# Altium PCB TB6600_Base.PcbDoc (part 2 of 4)
Units mm, origin at the board's own origin, x right, y up, seen from the top; angles counter-clockwise.
Board outline 300 x 300 mm, 2 copper layers (Top Layer, Bottom Layer); 129 components, 65 nets, 411 pads, 153 vias.
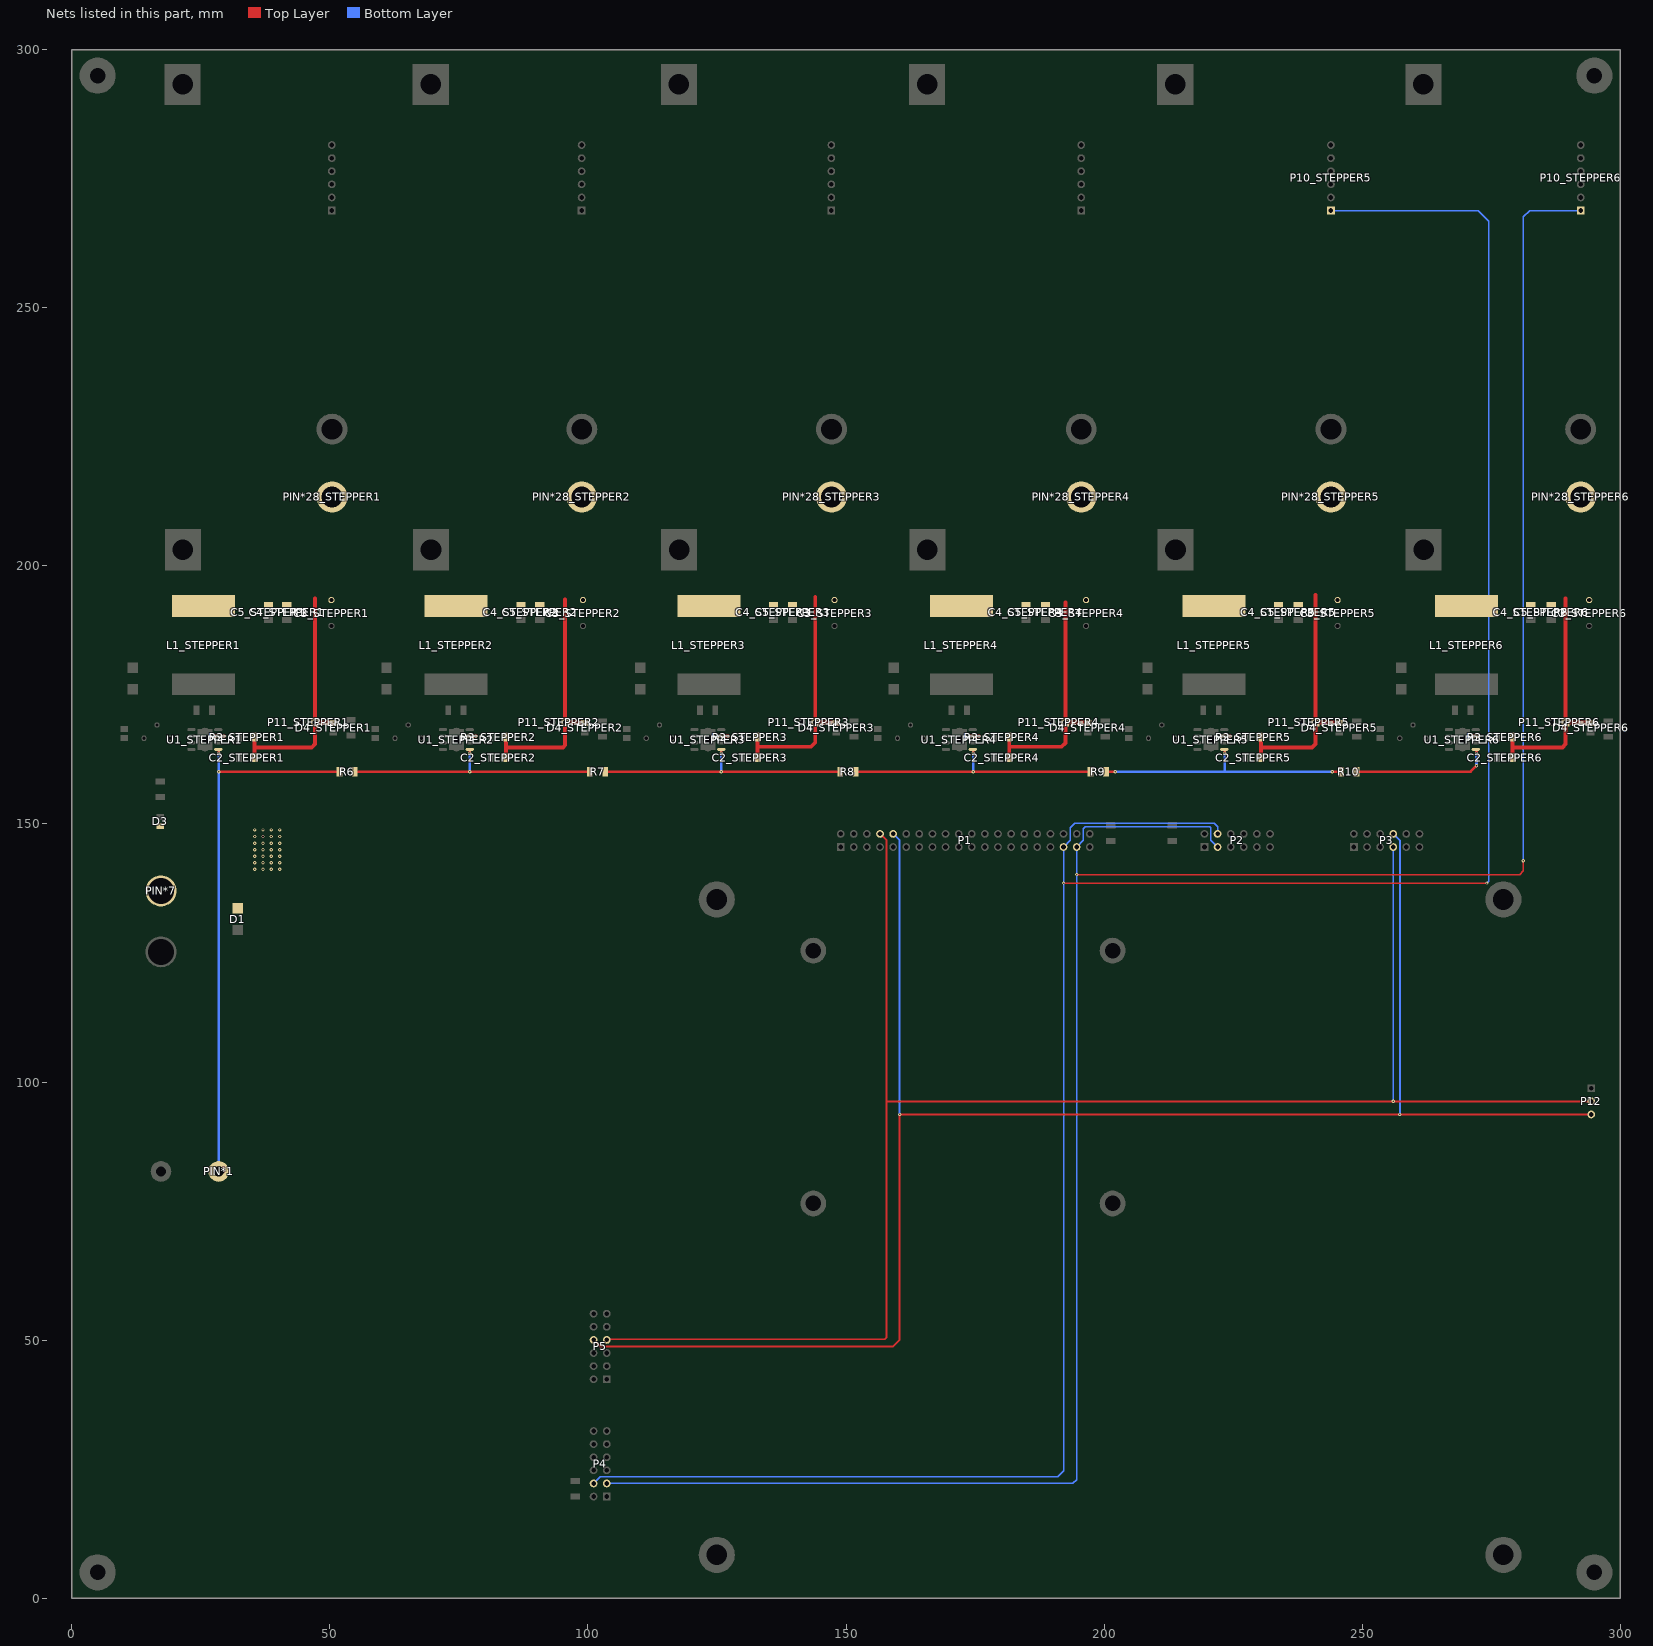
[diagram p2: the nets of this part, all layers, seen from the top]

## Via types
v1: diameter 0.65, hole 0.3, Top Layer to Bottom Layer, tented both sides, 153 vias

## Nets (pads, with @x,y where several pads share a name; then routed paths per layer and width w, separated by ;. In a path a pad name is that pad's centre, name@x,y a point inside that pad or via, vN(x,y) a via of type N, cw(c..) or ccw(c..) an arc to the next point about the centre after c; other vN are vias at no path point) (continued)
PLUSE5: P1.35 P2.4 P4.4 P10_STEPPER5.1 | length 489.7
  Top Layer w0.254: v1(192.151,138.557) v1(274.193,138.557)
  Bottom Layer w0.254: P4.4@101.092,22.225 102.362,23.495 191.008,23.495 192.151,24.638 192.151,30.353 v1(192.151,138.557) P1.35@192.151,145.542 193.421,146.812 193.421,149.225 194.31,150.114 221.361,150.114 221.996,149.479 P2.4@221.996,148.082 ; P10_STEPPER5.1@243.958,268.859 272.542,268.859 274.574,266.827 274.574,138.938 v1(274.193,138.557)
PLUSE6: P1.37 P2.3 P4.3 P10_STEPPER6.1 | length 472.4
  Top Layer w0.254: v1(194.691,140.208) 280.543,140.208 281.241,140.906 v1(281.241,142.875)
  Bottom Layer w0.254: P4.3@103.632,22.225 193.929,22.225 194.691,22.987 v1(194.691,140.208) P1.37@194.691,145.542 195.961,146.812 195.961,149.098 196.342,149.479 220.472,149.479 220.698,149.253 220.698,146.84 P2.3@221.996,145.542 ; v1(281.241,142.875) 281.241,267.652 282.448,268.859 P10_STEPPER6.1@292.354,268.859
RXD: P1.10 P3.8 P5.8 P12.3 | length 347.8
  Top Layer w0.381: P5.8@101.092,50.038 102.362,48.768 159.131,48.768 160.401,50.038 v1(160.401,93.726) P12.3@294.386,93.726
  Bottom Layer w0.381: P1.10@159.131,148.082 160.401,146.812 v1(160.401,93.726) ; P3.8@256.032,148.082 257.302,146.812 v1(257.302,93.726)
SAFTY1: PIN*1.1 R6.1 U1_STEPPER1.5 | length 105.2
  Top Layer w0.508: U1_STEPPER1.5@28.381,164.465 28.448,164.398 v1(28.448,163.703) ; v1(28.448,160.147) R6.1@51.85,160.147
  Bottom Layer w0.508: PIN*1.1@28.448,82.677 v1(28.448,160.147) v1(28.448,163.703)
SAFTY2: R6.2 R7.1 U1_STEPPER2.5 | length 49.9
  Top Layer w0.508: R6.2@54.83,160.147 R7.1@100.364,160.147 ; v1(77.089,163.703) 77.089,164.444 U1_STEPPER2.5@77.11,164.465
  Bottom Layer w0.508: v1(77.089,160.147) v1(77.089,163.703)
SAFTY3: R7.2 R8.1 U1_STEPPER3.5 | length 49.9
  Top Layer w0.508: R7.2@103.344,160.147 R8.1@148.878,160.147 ; U1_STEPPER3.5@125.839,164.465 125.857,164.447 v1(125.857,163.703)
  Bottom Layer w0.508: v1(125.857,160.147) v1(125.857,163.703)
SAFTY4: R8.2 R9.1 U1_STEPPER4.5 | length 49.9
  Top Layer w0.508: R8.2@151.858,160.147 R9.1@197.392,160.147 ; U1_STEPPER4.5@174.569,164.465 174.625,164.409 v1(174.625,163.703)
  Bottom Layer w0.508: v1(174.625,160.147) v1(174.625,163.703)
SAFTY5: R9.2 R10.1 U1_STEPPER5.5 | length 49.9
  Top Layer w0.508: R9.2@200.372,160.147 v1(202.184,160.147) ; U1_STEPPER5.5@223.298,164.465 223.393,164.37 v1(223.393,163.703) ; v1(244.221,160.147) R10.1@245.906,160.147
  Bottom Layer w0.508: v1(202.184,160.147) 223.393,160.147 ; v1(223.393,163.703) 223.393,160.147 ; v1(244.221,160.147) 223.393,160.147
SAFTY6: R10.2 U1_STEPPER6.5 | length 27
  Top Layer w0.508: R10.2@248.886,160.147 271.018,160.147 v1(272.161,161.29) ; U1_STEPPER6.5@272.027,164.465 272.161,164.331 v1(272.161,163.703)
  Bottom Layer w0.508: v1(272.161,161.29) v1(272.161,163.703)
TXD: P1.8 P3.7 P5.7 P12.2 | length 338.3
  Top Layer w0.381: P5.7@103.632,50.038 103.76,50.166 157.481,50.166 157.861,50.546 157.861,96.266 ; P1.8@156.591,148.082 157.861,146.812 157.861,96.266 ; P12.2@294.386,96.266 157.861,96.266
  Bottom Layer w0.381: v1(256.032,96.266) P3.7@256.032,145.542
VCC: D1.2 D3.A PIN*7.1 U1_STEPPER1.7 U1_STEPPER2.7 U1_STEPPER3.7 U1_STEPPER4.7 U1_STEPPER5.7 U1_STEPPER6.7 | length 8.9
  Top Layer w0.762: v1(27.94,167.005) U1_STEPPER1.7@28.381,167.005 v1(28.702,167.005) v1(29.464,167.005) ; v1(76.708,167.005) U1_STEPPER2.7@77.11,167.005 v1(77.457,167.005) v1(78.232,167.005) ; v1(125.476,167.005) U1_STEPPER3.7@125.839,167.005 v1(126.238,167.005) v1(127.127,167.005) ; v1(174.117,167.005) U1_STEPPER4.7@174.569,167.005 v1(174.942,167.005) v1(175.768,167.005) ; v1(222.885,167.005) U1_STEPPER5.7@223.298,167.005 v1(223.647,167.005) v1(224.409,167.005) ; v1(271.526,167.005) v1(272.027,167.005) v1(272.542,167.005)
  other v1: 35.433,141.224 37.042,141.224 38.65,141.224 40.259,141.224 35.433,142.494 37.042,142.494 38.65,142.494 40.259,142.494 35.433,143.764 37.042,143.764 38.65,143.764 40.259,143.764 35.433,145.034 37.042,145.034 38.65,145.034 40.259,145.034 35.433,146.304 37.042,146.304 38.65,146.304 40.259,146.304 35.433,147.574 37.042,147.574 38.65,147.574 40.259,147.574 35.433,148.844 37.042,148.844 38.65,148.844 40.259,148.844
VM_STEPPER1: C2_STEPPER1.1 C3_STEPPER1.1 C4_STEPPER1.1 C5_STEPPER1.1 D4_STEPPER1.A L1_STEPPER1.2 P11_STEPPER1.1 PIN*28_STEPPER1.1 R3_STEPPER1.1 | length 47.8
  Top Layer w0.762: C2_STEPPER1.1@35.399,162.865 35.399,164.846 ; R3_STEPPER1.1@35.399,166.853 35.399,164.846 ; 47.117,193.675 P11_STEPPER1.1@47.117,169.672 ; D4_STEPPER1.A@50.673,169.546 50.547,169.672 P11_STEPPER1.1@47.117,169.672 ; 35.399,164.846 46.482,164.846 47.117,165.481 P11_STEPPER1.1@47.117,169.672
VM_STEPPER2: C2_STEPPER2.1 C3_STEPPER2.1 C4_STEPPER2.1 C5_STEPPER2.1 D4_STEPPER2.A L1_STEPPER2.2 P11_STEPPER2.1 PIN*28_STEPPER2.1 R3_STEPPER2.1 | length 47.7
  Top Layer w0.762: C2_STEPPER2.1@84.142,162.865 84.142,164.859 ; R3_STEPPER2.1@84.142,166.853 84.142,164.859 ; 95.58,193.548 P11_STEPPER2.1@95.58,169.672 ; D4_STEPPER2.A@99.39,169.546 99.264,169.672 P11_STEPPER2.1@95.58,169.672 ; 84.142,164.859 95.186,164.859 95.58,165.252 P11_STEPPER2.1@95.58,169.672
VM_STEPPER3: C2_STEPPER3.1 C3_STEPPER3.1 C4_STEPPER3.1 C5_STEPPER3.1 D4_STEPPER3.A L1_STEPPER3.2 P11_STEPPER3.1 PIN*28_STEPPER3.1 R3_STEPPER3.1 | length 47.9
  Top Layer w0.762: C2_STEPPER3.1@132.884,162.865 132.884,164.973 ; R3_STEPPER3.1@132.884,166.853 132.884,164.973 ; 144.043,194.031 P11_STEPPER3.1@144.043,169.672 ; D4_STEPPER3.A@148.107,169.546 147.981,169.672 P11_STEPPER3.1@144.043,169.672 ; 132.884,164.973 143.256,164.973 144.043,165.76 P11_STEPPER3.1@144.043,169.672
VM_STEPPER4: C2_STEPPER4.1 C3_STEPPER4.1 C4_STEPPER4.1 C5_STEPPER4.1 D4_STEPPER4.A L1_STEPPER4.2 P11_STEPPER4.1 PIN*28_STEPPER4.1 R3_STEPPER4.1 | length 46.7
  Top Layer w0.762: C2_STEPPER4.1@181.627,162.865 181.627,164.973 ; R3_STEPPER4.1@181.627,166.853 181.627,164.973 ; 192.507,192.888 P11_STEPPER4.1@192.507,169.672 ; D4_STEPPER4.A@196.825,169.546 196.699,169.672 P11_STEPPER4.1@192.507,169.672 ; 181.627,164.973 191.77,164.973 192.507,165.71 P11_STEPPER4.1@192.507,169.672
VM_STEPPER5: C2_STEPPER5.1 C3_STEPPER5.1 C4_STEPPER5.1 C5_STEPPER5.1 D4_STEPPER5.A L1_STEPPER5.2 P11_STEPPER5.1 PIN*28_STEPPER5.1 R3_STEPPER5.1 | length 48.3
  Top Layer w0.762: C2_STEPPER5.1@230.369,162.865 230.369,164.859 ; R3_STEPPER5.1@230.369,166.853 230.369,164.859 ; 240.97,194.361 P11_STEPPER5.1@240.97,169.672 ; D4_STEPPER5.A@245.542,169.546 245.416,169.672 P11_STEPPER5.1@240.97,169.672 ; 230.369,164.859 240.297,164.859 240.97,165.532 P11_STEPPER5.1@240.97,169.672
VM_STEPPER6: C2_STEPPER6.1 C3_STEPPER6.1 C4_STEPPER6.1 C5_STEPPER6.1 D4_STEPPER6.A L1_STEPPER6.2 P11_STEPPER6.1 PIN*28_STEPPER6.1 R3_STEPPER6.1 | length 47.6
  Top Layer w0.762: C2_STEPPER6.1@279.112,162.865 279.112,164.859 ; R3_STEPPER6.1@279.112,166.853 279.112,164.859 ; 289.433,193.675 P11_STEPPER6.1@289.433,169.672 ; D4_STEPPER6.A@294.259,169.546 294.133,169.672 P11_STEPPER6.1@289.433,169.672 ; 279.112,164.859 288.811,164.859 289.433,165.481 P11_STEPPER6.1@289.433,169.672
pads on no net: J1_STEPPER1.9 J1_STEPPER2.9 J1_STEPPER3.9 J1_STEPPER4.9 J1_STEPPER5.9 J1_STEPPER6.9 P1.3 P1.5 P1.12 P1.16 P1.18 P1.22 P1.24 P1.26 P1.27 P1.28 P1.32 P1.36 P1.38 P2.1 P4.1 U1_STEPPER1.2 U1_STEPPER1.3 U1_STEPPER2.2 U1_STEPPER2.3 U1_STEPPER3.2 U1_STEPPER3.3 U1_STEPPER4.2 U1_STEPPER4.3 U1_STEPPER5.2 U1_STEPPER5.3 U1_STEPPER6.2 U1_STEPPER6.3
copper on no net: | length 3518.8